# Altium PCB WIFI_PCB.PcbDoc
Units mil, origin at the board's own origin, x right, y up, seen from the top; angles counter-clockwise.
Board outline 1180 x 2621.21 mil, 4 copper layers (Top Layer, GND, 3v3, Bottom Layer), stack 23.756 mil thick; 58 components, 53 nets, 284 pads, 88 vias.
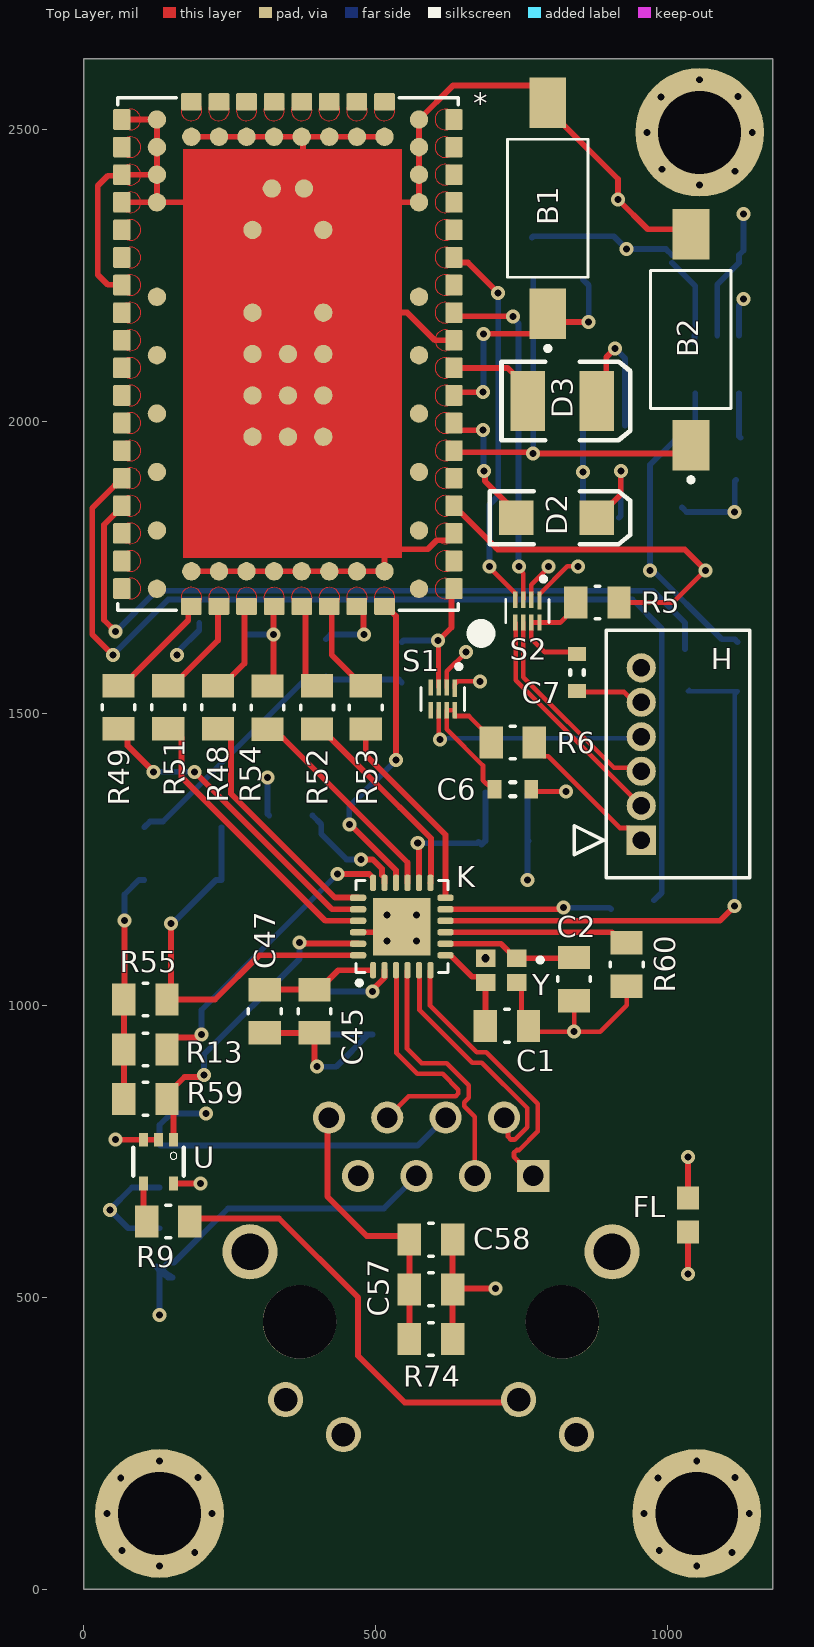
[diagram p0: Top Layer view]
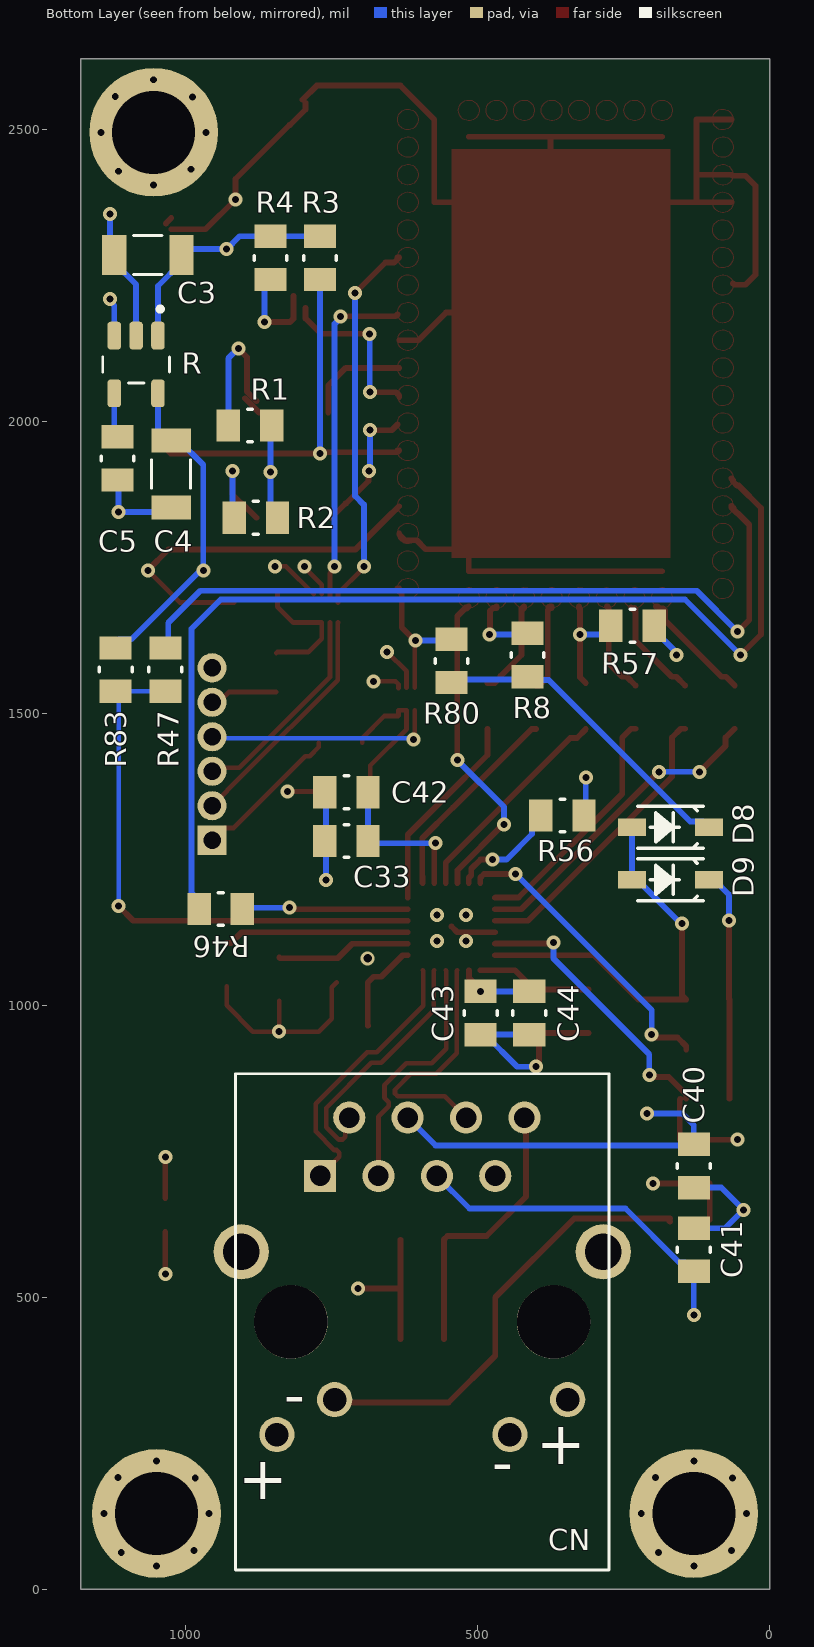
[diagram p1: Bottom Layer view, seen from below]
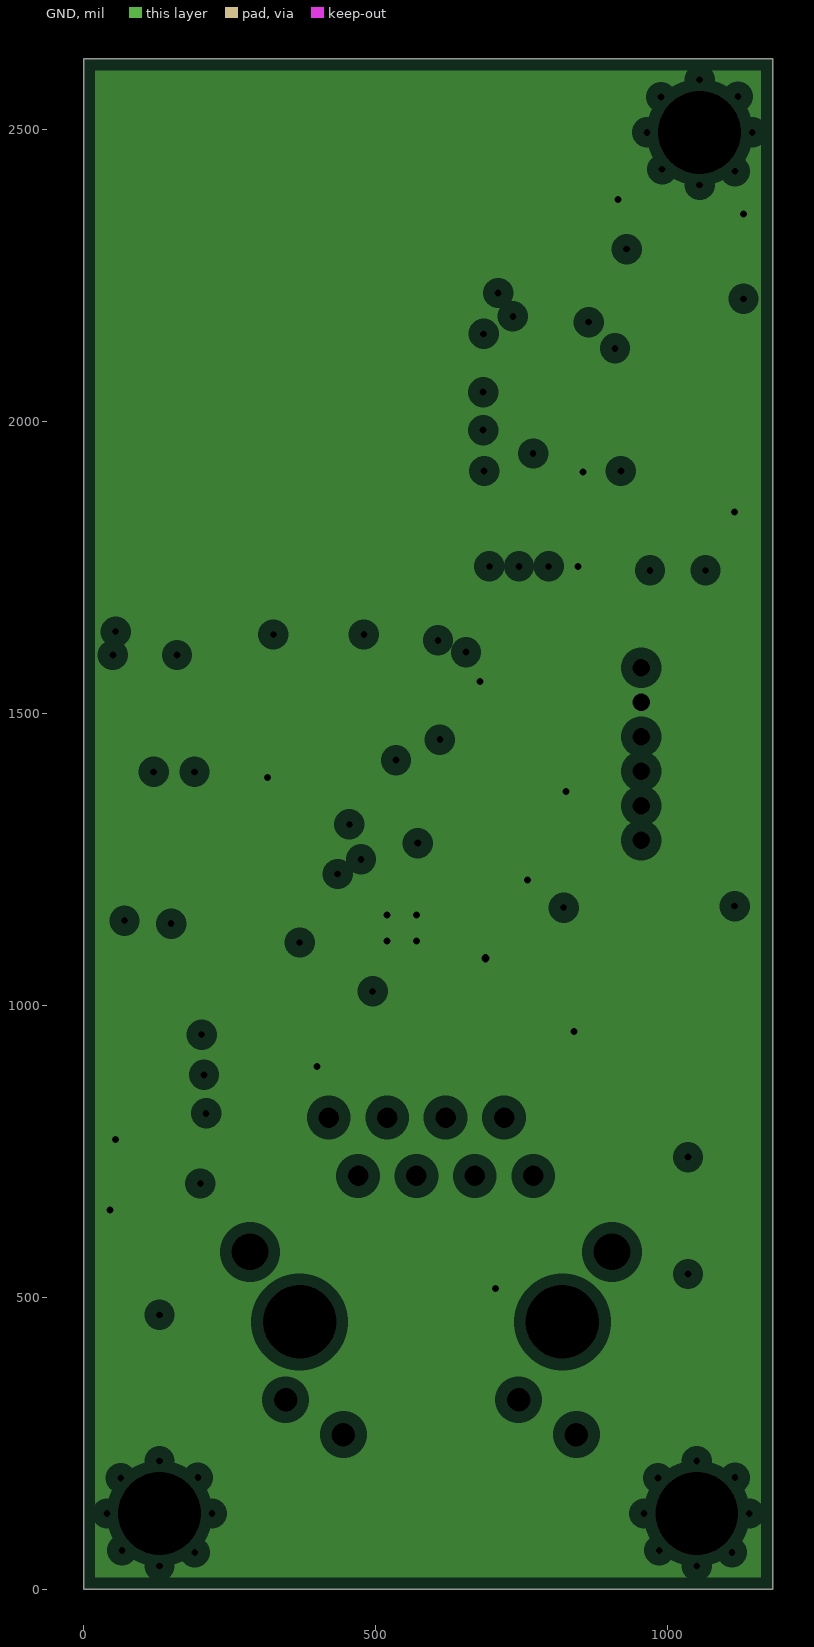
[diagram p2: GND, clearances drawn from the general rule]
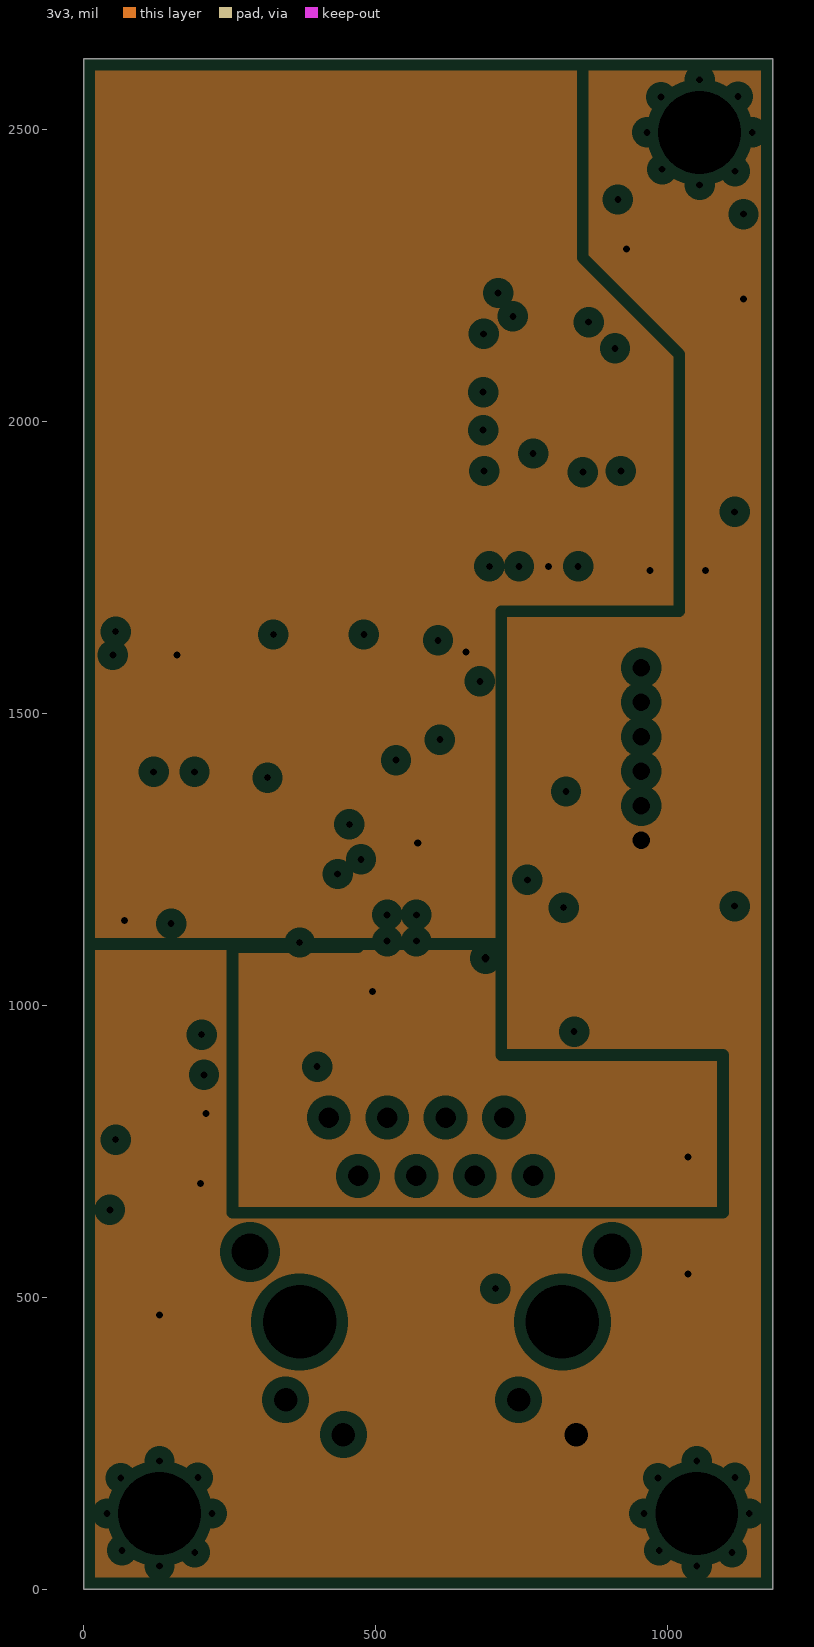
[diagram p3: 3v3, clearances drawn from the general rule]

## Layer stack, top to bottom
Top Solder: solder mask 0.4, Solder Resist, Dk 3.5
Top Layer: signal copper 1.4
Dielectric 2: prepreg 2.8, PP-006, Dk 4.1
GND: plane copper 1.378, net GND
Dielectric 1: dielectric 12.6, FR-4, Dk 4.8
3v3: plane copper 1.378, net (Multiple Nets)
Dielectric 3: prepreg 2.8, PP-006, Dk 4.1
Bottom Layer: signal copper 1.4
Bottom Solder: solder mask 0.4, Solder Resist, Dk 3.5

## Board outline
0,2621.21 0,0 1180,0 1180,2621.21

## Design rules (kind name [scope] priority, off if disabled: settings)
Clearance [All] p1: gap=5 ignorepadtopadclearanceinfootprint=FALSE // Default=10mil
DiffPairsRouting [All] p1: maxlimit=10 minlimit=10 mostfreqgap=10 toplayer_minwidth=8 toplayer_maxwidth=15 toplayer_prefwidth=15 bottomlayer_minwidth=10 bottomlayer_maxwidth=15 bottomlayer_prefwidth=15 maxuncoupledlength=500 // DefaultMinWidth=15mil
HoleSize [All] p1: absolutevalues=TRUE maxlimit=150 minlimit=1 maxpercent=80.000 minpercent=20.000 // MaximumDefault=100mil
MinimumSolderMaskSliver [All] p1: minsoldermaskwidth=1 // Default=10mil
PlaneClearance [All] p1: clearance=20
PlaneConnect [All] p1: planeconnectstyle=Relief reliefexpansion=20 reliefentries=4 reliefconductorwidth=10 reliefairgap=10
PolygonConnect [All] p1: connectstyle=Relief reliefconductorwidth=10 reliefentries=4 polygonreliefangle="90 Angle" airgapwidth=10
RoutingVias [All] p1: holewidth=28 width=50 viastyle="Through Hole" minholewidth=28 minwidth=50 maxholewidth=28 maxwidth=50
SilkToSolderMaskClearance [IsPad] p1: minsilkscreentomaskgap=4 clearancetoexposedcopper=TRUE // Default=10mil
SolderMaskExpansion [All] p1: expansion=4 istentingtop=FALSE
Width [All] p1: maxlimit=10 minlimit=8 preferedwidth=10 minimp=50.000000 maximp=50.000000 favimp=50.000000 // MinWidthDefault=10mil
24 further rules are at their usual default settings.

## Classes and differential pairs
differential pair PHY_TX: +PHY_TX_P -PHY_TX_N
differential pair PHY_RX: +PHY_RX_P -PHY_RX_N

## Components (designator, comment, footprint, x,y, rotation, side; value= is the part's Value field where it differs from the comment)
* "ODIN-W262" ODIN-W262 349.95,2115.35 r90 top
B1 "push button" TECO-FSMSM 795,2365 r90 top
B2 "push button" TECO-FSMSM 1040,2140 r90 top
C1 "22uF 10V" 0805 725,965 r0 top value=22uF
C2 "22uF 10V" 0805 840,1045 r270 top value=22uF
C3 "10UF 25V" 1206 1065,2285 r0 bottom value=10uF
C4 "10UF 25V" 1206 1025,1910 r270 bottom value=10uF
C5 "10nF 50V" 0805 1117,1936.69 r270 bottom value=10nF
C6 "100pF" 0603 735,1370 r0 top
C7 "100pF" 0603 845,1570 r270 top
C33 "2.2uF 16V" 0805 725,1281.72 r180 bottom value=2.2uF
C40 "100nF 50V" 0805 130,725 r90 bottom value=100nF
C41 "100nF 50V" 0805 130,581.49 r270 bottom value=100nF
C42 "100nF 50V" 0805 725,1365 r180 bottom value=100nF
C43 "2.2uF 16V" 0805 495,987 r90 bottom value=2.2uF
C44 "100nF 50V" 0805 411.72,987 r90 bottom value=100nF
C45 "100nF 50V" 0805 395.32,990 r90 top value=100nF
C47 "100nF 50V" 0805 310.32,990 r90 top value=100nF
C57 "100nF 50V" 0805 595,513.79 r0 top value=100nF
C58 "100nF 50V" 0805 595,598.79 r0 top value=100nF
CN "CN J00-0045NL" "RJ45 J00-0045NL" 595,457.91 r0 bottom
D2 "LED2" 3.2X1.6X1.1 810,1835 r0 top
D3 "LED3" 3.5X2.8X1.9 820,2035 r0 top
D8 "SM5817PL-TP" SOD-123 170,1305 r0 bottom
D9 "SM5817PL-TP" SOD-123 170,1215 r0 bottom
FL "BLM18PG300SN1D" BEADC1608X95N 1035,641.06 r90 top
H "S6B-ZR(LF)(SN)" S6B-ZR_JST 955,1282.83 r90 top
K "KSZ8081RNAIA-TR" QFN50P400X400X90-25N 545,1135 r90 top
R "LP2992IM5-1.8" SOT95P280X145-5N 1085,2097.5 r270 bottom
R1 "270" 0805 890,1993 r0 bottom
R2 "270" 0805 880,1835 r0 bottom
R3 "1k" 0805 770,2280 r90 bottom
R4 "1k" 0805 855,2280 r90 bottom
R5 "200k" 0805 880,1690 r0 top
R6 "200k" 0805 735,1450 r0 top
R8 "JUMPER" 0805 415,1600 r90 bottom value=0
R9 "120" 0805 145,630 r180 top
R13 "1k" 0805 106,924.46 r180 top
R46 "10.0" 0805 940,1165 r0 bottom
R47 "10.0" 0805 1035,1575 r90 bottom
R48 "10.0" 0805 230,1510.63 r270 top
R49 "10.0" 0805 60,1510.63 r270 top
R51 "10.0" 0805 145,1510.63 r270 top
R52 "10.0" 0805 400,1510.24 r90 top
R53 "10.0" 0805 483.28,1510.24 r90 top
R54 "10.0" 0805 315,1510 r90 top
R55 "1k" 0805 106,1010 r180 top
R56 "1k" 0805 355,1325 r180 bottom
R57 "1k" 0805 235,1650 r0 bottom
R59 "1k" 0805 106,840 r0 top
R60 "6.8k" 0805 930,1070 r90 top
R74 "16m" 0805 595,428.79 r180 top
R80 "JUMPER" 0805 545,1590 r90 bottom value=0
R83 "4.7k" 0805 1120,1575 r270 bottom
S1 "PCA9306DQER" SON35P140X100X40-8N 615,1525 r270 top
S2 "PCA9306DQER" SON35P140X100X40-8N 760,1675 r270 top
U "NC7SZ125" SC70-5 128.41,732.4 r180 top
Y "ECS-250-10-37-JTN-TR" XTAL_ECS-250-10-37-JTN-TR 715,1060 r180 top

## Footprints (in the part's own frame and the unit in brackets; to place one, negate y for a bottom-side part, rotate by r counter-clockwise, add the part's x,y. Pads: shape width x height; smd on the part's side, far side on the other; paste and mask are expansions set on the pad)
3.2X1.6X1.1 [mm]
  rect 1.5x1.5 smd: 1(-1.75,0) 2(1.75,0)
  silkscreen extent -2.9,-1.15 3.2,1.15
3.5X2.8X1.9 [mm] "SM LED; 2 C-Bend Leads; Body 3.5 x 2.8 x 1.9 mm, inc leads (LxWxH typ)"
  rect 1.5x2.6 smd: 1(-1.5,0) 2(1.5,0)
  silkscreen extent -2.65,-1.7 2.95,1.7
0603 [mm] "Chip Resistor, 2-Leads, Body 1.60x0.80mm, IPC High Density"
  rect 0.6x0.8 smd: 1(-0.8,0) 2(0.8,0)
  silkscreen extent -0.1,-0.3 0.1,0.3, body extent -0.8,-0.4 0.8,0.4, height 0.6
0805 [mil]
  rect 40x55 smd: 1(-37,0) 2(37,0)
  silkscreen extent -4,-28 4,28, body extent -47,-28 47,28, height 24
1206 [mm]
  rect 1.05x1.72 smd: 1(-1.46,0) 2(1.46,0)
  silkscreen extent -0.62,-0.85 0.62,0.85
BEADC1608X95N [mm]
  rect 1x0.97 smd: 1(-0.735,0) 2(0.735,0)
ODIN-W262 [mm]
  round 0.8 smd: 1(6.6,-5.7) 2(7.8,-5.7) 3(9,-5.7) 4(10.2,-5.7) 5(9.45,-4.2) 6(9.45,-3) 7(9.45,-1.8) 8(9.45,-0.6) 9(9.45,0.6) 10(9.45,1.8) 11(9.45,3) 12(9.45,4.2) 13(10.2,5.7) 14(9,5.7) 15(7.8,5.7) 16(6.6,5.7) 17(-9.45,4.2) 18(-9.45,3) 19(-9.45,1.8) 20(-9.45,0.6) 21(-9.45,-0.6) 22(-9.45,-1.8) 23(-9.45,-3) 24(-9.45,-4.2) 25(-3.6,-1.54) 26(-1.8,-1.54) 27(0,-1.54) 28(1.8,-1.54) 29(5.4,-1.54) 30(7.2,-0.7) 31(-3.6,0) 32(-1.8,0) 33(0,0) 34(-3.6,1.54) 35(-1.8,1.54) 36(0,1.54) 37(1.8,1.54) 38(5.4,1.54) 39(7.2,0.7) TP1(2.49,-5.7) TP2(2.49,5.7) TP3(-0.05,-5.7) TP4(-0.05,5.7) TP5(-2.59,-5.7) TP6(-2.59,5.7) TP7(-5.13,-5.7) TP8(-5.13,5.7) TP9(-7.67,-5.7) TP10(-7.67,5.7) TP11(-10.21,-5.7) TP12(-10.21,5.7)
  rrect15% 0.9x0.75 smd paste-1 mask+0: A1(-10.2,-7.225) A2(-9,-7.225) A3(-7.8,-7.225) A4(-6.6,-7.225) A5(-5.4,-7.225) A6(-4.2,-7.225) A7(-3,-7.225) A8(-1.8,-7.225) A9(-0.6,-7.225) A10(0.6,-7.225) A11(1.8,-7.225) A12(3,-7.225) A13(4.2,-7.225) A14(5.4,-7.225) A15(6.6,-7.225) A16(7.8,-7.225) A17(9,-7.225) A18(10.2,-7.225) C1(10.2,7.225) C2(9,7.225) C3(7.8,7.225) C4(6.6,7.225) C5(5.4,7.225) C6(4.2,7.225) C7(3,7.225) C8(1.8,7.225) C9(0.6,7.225) C10(-0.6,7.225) C11(-1.8,7.225) C12(-3,7.225) C13(-4.2,7.225) C14(-5.4,7.225) C15(-6.6,7.225) C16(-7.8,7.225) C17(-9,7.225) C18(-10.2,7.225)
  rrect15% 0.75x0.9 smd paste-1 mask+0: B1(10.975,-4.2) B2(10.975,-3) B3(10.975,-1.8) B4(10.975,-0.6) B5(10.975,0.6) B6(10.975,1.8) B7(10.975,3) B8(10.975,4.2) D1(-10.975,4.2) D2(-10.975,3) D3(-10.975,1.8) D4(-10.975,0.6) D5(-10.975,-0.6) D6(-10.975,-1.8) D7(-10.975,-3) D8(-10.975,-4.2)
  Top Layer circle w0: c10.2,6.85 r0.45
  Top Layer circle w0: c10.6,4.2 r0.45
  Top Layer circle w0: c10.6,3 r0.45
  Top Layer circle w0: c10.6,1.8 r0.45
  Top Layer circle w0: c10.6,0.6 r0.45
  Top Layer circle w0: c10.6,-0.6 r0.45
  Top Layer circle w0: c10.6,-1.8 r0.45
  Top Layer circle w0: c10.6,-3 r0.45
  Top Layer circle w0: c10.6,-4.2 r0.45
  Top Layer circle w0: c4.2,6.85 r0.45
  Top Layer circle w0: c5.4,6.85 r0.45
  Top Layer circle w0: c9,6.85 r0.45
  Top Layer circle w0: c-10.2,6.85 r0.45
  Top Layer circle w0: c-9,6.85 r0.45
  Top Layer circle w0: c-7.8,6.85 r0.45
  Top Layer circle w0: c-4.2,6.85 r0.45
  Top Layer circle w0: c-3,6.85 r0.45
  Top Layer circle w0: c-1.8,6.85 r0.45
  Top Layer circle w0: c-0.6,6.85 r0.45
  Top Layer circle w0: c0.6,6.85 r0.45
  Top Layer circle w0: c1.8,6.85 r0.45
  Top Layer circle w0: c-5.4,-6.85 r0.45
  Top Layer circle w0: c-9,-6.85 r0.45
  Top Layer circle w0: c10.2,-6.85 r0.45
  Top Layer circle w0: c9,-6.85 r0.45
  Top Layer circle w0: c7.8,-6.85 r0.45
  Top Layer circle w0: c6.6,-6.85 r0.45
  Top Layer circle w0: c5.4,-6.85 r0.45
  Top Layer circle w0: c3,-6.85 r0.45
  Top Layer lines w0: -4.2,-7.3 ccw(c-4.2,-6.85) -4.169,-7.299 ccw(c-4.2,-6.85) -4.27,-7.295 ccw(c-4.2,-6.85) -4.2,-7.3 ; -4.2,-7.3 ccw(c-4.2,-6.85) -4.2,-7.3 ; -5.414,7.3 cw(c-5.4,6.85) -5.4,6.4 cw(c-5.4,6.85) -5.667,6.488 cw(c-5.4,6.85) -5.486,7.292 cw(c-5.4,6.85) -5.414,7.3 ; 2.968,7.299 cw(c3,6.85) 3.07,7.295 cw(c3,6.85) 3.131,7.281 cw(c3,6.85) 3,6.4 cw(c3,6.85) 2.968,7.299 ; 7.756,7.298 cw(c7.8,6.85) 7.8,6.4 cw(c7.8,6.85) 7.669,7.281 cw(c7.8,6.85) 7.756,7.298 ; 6.53,7.295 cw(c6.6,6.85) 6.6,6.4 cw(c6.6,6.85) 6.53,7.295 ; -6.731,7.281 ccw(c-6.6,6.85) -6.6,6.4 ccw(c-6.6,6.85) -6.731,7.281 ; -11.031,4.331 ccw(c-10.6,4.2) -11.042,4.286 ccw(c-10.6,4.2) -11.045,4.27 ccw(c-10.6,4.2) -11.047,4.251 ccw(c-10.6,4.2) -11.05,4.207 ccw(c-10.6,4.2) -11.05,4.2 ccw(c-10.6,4.2) -11.045,4.13 ccw(c-10.6,4.2) -10.6,3.75 ccw(c-10.6,4.2) -11.031,4.331 ; -11.031,3.131 cw(c-10.6,3) -10.6,2.55 cw(c-10.6,3) -11.05,3 cw(c-10.6,3) -11.045,3.07 cw(c-10.6,3) -11.037,3.107 cw(c-10.6,3) -11.031,3.131 ; -11.042,1.886 ccw(c-10.6,1.8) -11.05,1.8 ccw(c-10.6,1.8) -11.045,1.73 ccw(c-10.6,1.8) -10.6,1.35 ccw(c-10.6,1.8) -11.042,1.886 ; -11.047,0.651 ccw(c-10.6,0.6) -11.05,0.6 ccw(c-10.6,0.6) -11.031,0.469 ccw(c-10.6,0.6) -10.6,0.15 ccw(c-10.6,0.6) -11.047,0.651 ; -11.05,-0.6 ccw(c-10.6,-0.6) -11.05,-0.619 ccw(c-10.6,-0.6) -11.049,-0.636 ccw(c-10.6,-0.6) -11.031,-0.731 ccw(c-10.6,-0.6) -10.6,-1.05 ccw(c-10.6,-0.6) -11.05,-0.6 ; -11.048,-1.762 ccw(c-10.6,-1.8) -11.05,-1.8 ccw(c-10.6,-1.8) -11.045,-1.87 ccw(c-10.6,-1.8) -11.039,-1.901 ccw(c-10.6,-1.8) -11.031,-1.931 ccw(c-10.6,-1.8) -10.6,-2.25 ccw(c-10.6,-1.8) -11.048,-1.762 ; -11.031,-2.869 ccw(c-10.6,-3) -11.05,-3 ccw(c-10.6,-3) -11.049,-3.032 ccw(c-10.6,-3) -11.043,-3.076 ccw(c-10.6,-3) -11.042,-3.086 ccw(c-10.6,-3) -11.034,-3.118 ccw(c-10.6,-3) -11.031,-3.131 ccw(c-10.6,-3) -10.6,-3.45 ccw(c-10.6,-3) -11.031,-2.869 ; -11.05,-4.2 ccw(c-10.6,-4.2) -11.031,-4.331 ccw(c-10.6,-4.2) -10.975,-4.449 ccw(c-10.6,-4.2) -10.6,-4.65 ccw(c-10.6,-4.2) -11.05,-4.2 ; 0.6,-6.4 cw(c0.6,-6.85) 0.6,-7.3 cw(c0.6,-6.85) 0.6,-6.4 ; -8.067,-6.488 ccw(c-7.8,-6.85) -8.098,-6.513 ccw(c-7.8,-6.85) -7.8,-7.3 ccw(c-7.8,-6.85) -8.067,-6.488 ; -10.069,-7.281 cw(c-10.2,-6.85) -10.114,-7.292 cw(c-10.2,-6.85) -10.2,-7.3 cw(c-10.2,-6.85) -10.27,-7.295 cw(c-10.2,-6.85) -10.069,-7.281 ; -6.731,-7.281 cw(c-6.6,-6.85) -6.6,-7.3 cw(c-6.6,-6.85) -6.613,-7.3 cw(c-6.6,-6.85) -6.667,-7.295 cw(c-6.6,-6.85) -6.67,-7.295 cw(c-6.6,-6.85) -6.697,-7.289 cw(c-6.6,-6.85) -6.731,-7.281 ; -3.131,-7.281 cw(c-3,-6.85) -3,-7.3 cw(c-3,-6.85) -3.057,-7.296 cw(c-3,-6.85) -3.131,-7.281 ; -0.514,-7.292 cw(c-0.6,-6.85) -0.6,-7.3 cw(c-0.6,-6.85) -0.614,-7.3 cw(c-0.6,-6.85) -0.67,-7.295 cw(c-0.6,-6.85) -0.514,-7.292 ; -1.87,-7.295 cw(c-1.8,-6.85) -1.73,-7.295 cw(c-1.8,-6.85) -1.787,-7.3 cw(c-1.8,-6.85) -1.8,-7.3 cw(c-1.8,-6.85) -1.87,-7.295 ; 1.73,-7.295 ccw(c1.8,-6.85) 1.8,-7.3 ccw(c1.8,-6.85) 1.849,-7.297 ccw(c1.8,-6.85) 1.87,-7.295 ccw(c1.8,-6.85) 1.73,-7.295 ; 4.13,-7.295 ccw(c4.2,-6.85) 4.2,-7.3 ccw(c4.2,-6.85) 4.13,-7.295
  silkscreen extent -12.4,-8.65 11.15,7.4, body extent -11.15,-7.4 11.15,7.4, height 4.8
QFN50P400X400X90-25N [mm]
  rrect70% 0.71x0.27 smd: 1(-1.9,1.25) 2(-1.9,0.75) 3(-1.9,0.25) 4(-1.9,-0.25) 5(-1.9,-0.75) 6(-1.9,-1.25) 13(1.9,-1.25) 14(1.9,-0.75) 15(1.9,-0.25) 16(1.9,0.25) 17(1.9,0.75) 18(1.9,1.25)
  rrect70% 0.27x0.71 smd: 7(-1.25,-1.9) 8(-0.75,-1.9) 9(-0.25,-1.9) 10(0.25,-1.9) 11(0.75,-1.9) 12(1.25,-1.9) 19(1.25,1.9) 20(0.75,1.9) 21(0.25,1.9) 22(-0.25,1.9) 23(-0.75,1.9) 24(-1.25,1.9)
  rect 2.5x2.5 smd paste-2: 25(0,0)
  silkscreen extent -2.55,-2 2,2
"RJ45 J00-0045NL" [mm]
  rect 1.398x1.398 hole 0.89: 1(4.445,-6.35)
  round 1.398 hole 0.89: 2(3.175,-8.89) 3(1.905,-6.35) 4(0.635,-8.89) 5(-0.635,-6.35) 6(-1.905,-8.89) 7(-3.175,-6.35) 8(-4.445,-8.89)
  round 1.53 hole 1.02: 9(6.325,4.9) 10(3.81,3.38) 11(-3.81,4.9) 12(-6.325,3.38)
  round 3.2 hole 3.2 unplated: None(-5.715,0) None(5.715,0)
  round 2.4 hole 1.6: S1(-7.875,-3.05) S2(7.875,-3.05)
  silkscreen extent -8.13,-10.79 8.13,10.79, body extent -8.12,-10.79 8.12,10.8, height 13.64
S6B-ZR_JST [mil]
  rect 50x50 hole 30 mask+0: 1(0,0)
  round 50 hole 30 mask+0: 2(59.06,0) 3(118.11,0) 4(177.17,0) 5(236.22,0) 6(295.28,0)
  silkscreen extent -64,-186 359,115, body extent 0,0 10,10, height 10
SC70-5 [mm]
  rect 0.4x0.6 smd: 1(-0.65,-0.95) 2(0,-0.95) 3(0.65,-0.95) 4(0.65,0.95) 5(-0.65,0.95)
  silkscreen extent -1.1,-0.6 1.1,0.6
SOD-123 [mil]
  rect 48x30 smd: A(66,0) C(-66,0)
  silkscreen extent -56,-36 56,36
SON35P140X100X40-8N [mm]
  rect 0.77x0.19 smd: 1(-0.465,0.525)
  rect 0.71x0.19 smd: 2(-0.495,0.175) 3(-0.495,-0.175) 4(-0.495,-0.525) 5(0.495,-0.525) 6(0.495,-0.175) 7(0.495,0.175) 8(0.495,0.525)
  silkscreen extent -1.5,-0.94 0.5,0.94
SOT95P280X145-5N [mm]
  rrect50% 1.21x0.59 smd: 1(-1.255,0.95) 2(-1.255,0) 3(-1.255,-0.95) 4(1.255,-0.95) 5(1.255,0.95)
  silkscreen extent -2.51,-1.45 0.8,1.45
TECO-FSMSM [mm]
  rect 2.19x1.6 smd: 1(-4.59,0) 2(4.59,0)
  silkscreen extent -6.2,-1.75 3,1.75
XTAL_ECS-250-10-37-JTN-TR [mm]
  rect 0.85x0.75 smd: 1(-0.675,-0.525) 2(0.675,-0.525) 3(0.675,0.525) 4(-0.675,0.525)
  silkscreen extent -1.8,-0.55 -1.6,-0.35

## Part data
B1 B2: library part Teco-FSMSM
C1 C2: library part "CAP 22uF 10V", "CAP CER 2.2UF 10V X5R 0805", Operating Temperature="-55°C ~ 85°C", Package=0805, Rating=10V, Temperature Coefficient=X5R, Tolerance=20%
C3 C4: library part "CAP 10uF 25V", "CAP CER 10UF 25V X5R 1206", Operating Temperature="-55°C ~ 85°C", Package=1206, Rating=25V, Temperature Coefficient=X5R, Tolerance=10%
C5: library part "CAP 10nF 50V", "CAP CER 10000PF 50V X7R 0805", Operating Temperature="-55°C ~ 125°C", Package=0805, Rating=50V, Temperature Coefficient=X7R, Tolerance=10%
C6 C7: library part "CAP 100pF 16V", "CAP CER 100PF 16V X5R 0603/0805", Operating Temperature="-55°C ~ 85°C", Package=0603/0805, Rating=16V, Temperature Coefficient=X5R, Tolerance=10%
C33 C43: library part "CAP 2.2uF 16V", "CAP CER 2.2UF 16V X7R 0805", Operating Temperature="-55°C ~ 125°C", Package=0805, Rating=16V, Temperature Coefficient=X7R, Tolerance=10%
C40 C41 C42 C44 C45 C47 C57 C58: library part "CAP 100nF 50V", "CAP CER 0.1UF 50V X7R 0805", Package=0805, Rating=50V, Tolerance=10%
CN: library part "CN MAGJACK", "CN MAGJACK 1PORT 100 BASE-TX", Package=None, Supplier Part Number 1=673-J00-0045NL, Digikey=553-1619-5-ND, Digikey Link=https://www.digikey.com/product-detail/en/pulse-electronics-network/J00-0045NL/553-1619-5-ND/1036860?utm_source=snapeda&utm_medium=aggregator&utm_campaign=symbol, MF="Pulse Electronics", MP=J00-0045NL, SnapEDA_Link=https://www.snapeda.com/parts/J00-0045NL/Pulse%20Electronics%20Network/view-part/87956/?ref=snap, Supplier 1=Mouser
D2: library part "LED RED SMD", "Typical RED, GREEN, YELLOW, AMBER GaAs LED", Color=Red, Current - Test=20mA, Lens Color=Colorless, Package=1206, Voltage - Forward (Vf) (Typ)=1.7V, Lens Transparency=Clear
D3: "Typical BLUE SiC LED", DatasheetVersion=16-Apr-2002, LatestRevisionDate=17-Dec-2003, LatestRevisionNote="PCB Footprint replaced.", PackageDescription="SM LED; 2 C-Bend Leads; Body 3.5 x 2.8 x 1.9 mm, inc leads (LxWxH typ)", PackageReference=3.5X2.8X1.9, PackageVersion=16-Apr-2002, Published=8-Jun-2000, Publisher="Altium Limited"
D8 D9: library part "DIODE SCHOTTKY 20V 1A", "Diode Schottky 20V 1A Surface Mount SOD-123FL", Current Rating=1A, Package=SOD-123, Voltage Rating=20V, ComponentLink1Description=digikey, ComponentLink1URL=https://www.digikey.ca/product-detail/en/on-semiconductor/MBR0540T1G/MBR0540T1GOSCT-ND/917967, Digikey=SM5817PL-TPMSCT-ND, Digikey Link=https://www.digikey.ca/product-detail/en/micro-commercial-co/SM5817PL-TP/SM5817PL-TPMSCT-ND/1793410, MF="Micro Commercial Co", MP=SM5817PL-TP
FL: "30 Ohms @ 100MHz 1 Power Line Ferrite Bead 0603 _1608 Metric_ 1A 50mOhm", Package="1608 Murata", Availability=Unavailable, MF=Murata, MP=BLM18PG300SN1D, Price=None, SnapEDA_Link=https://www.snapeda.com/parts/BLM18PG300SN1D/Murata/view-part/270173/?ref=snap
H: "No Description Available", Built_By=EMA_UL_Team, Copyright="Copyright (C) 2018 Accelerated Designs. All rights reserved", Manufacturer_Part_Number=S6B-ZR(LF)(SN), RefDes=RefDes, SourceLibrary=JST_2017-04-18, Type=DEV, Vendor=JST
K: "1/1 Transceiver Full RMII 24-QFN _4x4_", Package="QFN-24 Microchip", Availability=Unavailable, MF=Microchip, MP=KSZ8081RNAIA-TR, Price=None, SnapEDA_Link=https://www.snapeda.com/parts/KSZ8081RNAIA-TR/Microchip/view-part/482545/?ref=snap
R: Package=None, Availability=Unavailable, MP=LP2992IM5-1.8/NOPB, Price=None
R1 R2: library part "RES 270 1/8W", "RES SMD 270 OHM 5% 1/8W 0805", Package=0805, Power (Watts)=0.125W, Tolerance=5%
R3 R4 R13 R55 R56 R57 R59: library part "RES 1k 1/8W", "RES SMD 1K OHM 5% 1/8W 0805", Package=0805, Power (Watts)=0.125W, Tolerance=5%
R5 R6: library part "RES 200k 1/8W", "RES SMD 200K OHM 5% 1/8W 0805", Package=0805, Power (Watts)=0.125W, Tolerance=5%
R8 R80: library part "RES 0 JUMPER", "RES SMD 0 OHM JUMPER GENERIC 0805", Package=0805
R9: library part "RES 120.0 1/8W", "RES SMD 120 OHM 5% 1/8W 0805", Package=0805, Power (Watts)=0.125W, Tolerance=5%
R46 R47 R48 R49 R51 R52 R53 R54: library part "RES 10.0 1/8W - 5%", "RES SMD 10.0 OHM 5% 1/8W 0805", Package=0805, Power (Watts)=0.125W, Tolerance=5%
R60: library part "RES 6.8k 1/8W", "RES SMD 6.8K OHM 5% 1/8W 0805", Package=0805, Power (Watts)=0.125W, Tolerance=5%
R74: library part "RES 16m 1/2W", "RES SMD 0.016 OHM 1% 1/2W 0805 Thick Film", Case Code (Imperial)=0805, Case Code (Metric)=2012, Manufacturer=Panasonic, Manufacturer Part Number=ERJ-6BWFR016V, Max Operating Temperature=155°C, Max Power Dissipation=500mW, Min Operating Temperature=-55°C, Package Quantity=1, Resistance=16mR, Supplier Part Number 1=P.016AQCT-ND, Temperature Coefficient=200ppm/°C, Tolerance=1%, Case/Package=0805, Category="Chip SMD Resistors", ComponentLink1Description=https://datasheet.ciiva.com/11808/0900766b8126441d-11808690.pdf?src-supplier=RSComponents, ComponentLink1URL=https://datasheet.ciiva.com/11808/0900766b8126441d-11808690.pdf?src-supplier=RSComponents, ComponentLink2Description=https://datasheet.ciiva.com/2452/aoa0000ce3-2452594.pdf?src-supplier=Digi-Key, ComponentLink2URL=https://datasheet.ciiva.com/2452/aoa0000ce3-2452594.pdf?src-supplier=Digi-Key, ComponentLink3Description=https://datasheet.ciiva.com/2452/aoa0000ce3-2452592.pdf?src-supplier=Digi-Key, ComponentLink3URL=https://datasheet.ciiva.com/2452/aoa0000ce3-2452592.pdf?src-supplier=Digi-Key, ComponentLink4Description=https://datasheet.ciiva.com/2452/aoa0000ce3-2452593.pdf?src-supplier=Digi-Key, ComponentLink4URL=https://datasheet.ciiva.com/2452/aoa0000ce3-2452593.pdf?src-supplier=Digi-Key, ComponentLink5Description=https://datasheet.ciiva.com/9192/aoa0000ce3-9192761.pdf?src-supplier=Avnet, ComponentLink5URL=https://datasheet.ciiva.com/9192/aoa0000ce3-9192761.pdf?src-supplier=Avnet, ComponentLink6Description=https://datasheet.ciiva.com/17211/aoa0000ce3-17211370.pdf?src-supplier=Avnet+Europe, ComponentLink6URL=https://datasheet.ciiva.com/17211/aoa0000ce3-17211370.pdf?src-supplier=Avnet+Europe, Composition="Thick Film", Contact Plating=Tin, Depth=1.25mm, Features="Automotive AEC-Q200", Height=0.028inch, Lead Free="Lead Free", Length=2mm, Military Standard=Not, Mount="Surface Mount", Number of Pins=2, Number of Terminations=2, Packaging="Tape and Reel", Power Rating=500mW, Pricing 1="1=0.65000, 10=0.53800, 100=0.36140, 1000=0.21148, 2500=0.20917 (USD)", Radiation Hardening=No, RoHS=Yes, Stock 1=4585, Supplier 1=Digi-Key, Termination=SMD/SMT, Width=0.049inch
R83: library part "RES 4.7k 1/8W - 5%", "RES SMD 4.7k OHM 5% 1/8W 0805", Package=0805, Power (Watts)=0.125W, Tolerance=5%
S1 S2: "2-bit bidirectional I2C bus and SMBus voltage-level shifter 8-X2SON -40 to 85", Package="X2SON-8 Texas Instruments", Availability=Warning, MF="Texas Instruments", Mouser-Purchase-URL=https://snapeda.com/shop?store=Mouser&id=39064, MP=PCA9306DQER, Price=None, SnapEDA_Link=https://www.snapeda.com/parts/PCA9306DQER/Texas%20Instruments/view-part/39064/?ref=snap, Texas_Instruments-Purchase-URL=https://snapeda.com/shop?store=Texas+Instruments&id=39064
U: "Buffer, Non-Inverting 1 Element 1 Bit per Element 3-State Output SC-70-5", Package="SC-70 ON Semiconductor", Availability=Unavailable, MF="ON Semiconductor", MP=NC7SZ125, Price=None, SnapEDA_Link=https://www.snapeda.com/parts/NC7SZ125/ON%20Semiconductor/view-part/2686816/?ref=snap
Y: "SMD Crystal 2.0 x 1.6 x 0.45 mm ceramic package", Package=None, Availability=Unavailable, MP=ECS-250-10-37-JTN-TR, Price=None

## Free pads (board coordinates)
  round 125.98 hole 142 unplated: 6(130,130) 6(1050,130) 6(1055,2495)
  round 220.47 hole 141.73: ""(130,130) ""(1050,130) ""(1055,2495)

## Via types
v1: diameter 24, hole 12, Top Layer to Bottom Layer, 63 vias
v2: diameter 23.62, hole 11.81, Top Layer to Bottom Layer, tented both sides, 24 vias
v3: diameter 24, hole 14, Top Layer to Bottom Layer, 1 vias

## Nets (pads, with @x,y where several pads share a name; then routed paths per layer and width w, separated by ;. In a path a pad name is that pad's centre, name@x,y a point inside that pad or via, vN(x,y) a via of type N, cw(c..) or ccw(c..) an arc to the next point about the centre after c; other vN are vias at no path point)
1v8: C4.1 C33.2 C42.2 D9.C K.14 R13.2 R55.2 R57.1 R59.1 R83.1 R.5 S1.2 S2.2 | length 1416.6
  Top Layer w8: S1.2 621.89,1571.89 v1(655,1605) ; S2.2@766.89,1704.46 766.89,1720.12 v1@793.37,1746.6
  Top Layer w10: R59.1 R13.2 R55.2 70,1011 v1(70,1145) ; v1(572.26,1277.74) 574.53,1275.47 K.14
  Bottom Layer w10: v1(70,1145) 70,1190 95,1215 D9.C ; v1(160,1600) 162.68,1602.68 162.68,1607.18 198,1642.5 R57.1@198,1655 ; v1(572.26,1277.74) 674.01,1277.74 676.28,1280 681.28,1275 C33.2 C42.2 ; C4.1 1011.81,1967.48 970,1925.67 v1(970,1745) 970,1750 1093,1627 1115,1627 R83.1@1120,1622 ; C4.1@1030,1967.48 1031.93,1967.48 1047.6,1983.15 R.5
  other v1: 796.29,1751.94
3v3: *.A4 C3.1 C40.2 C41.2 CN.4 CN.5 CN.9 FL.1 H.1 R3.2 R4.2 R5.2 R6.2 R.1 R.3 U.5 | length 2769.4
  Top Layer w8: R6.2 772,1442.5 788,1426.5 795.5,1426.5 918.17,1303.83 934,1303.83 H.1 ; R5.2 1010,1690 1063.06,1743.06 1063.06,1745 v1(1065,1745)
  Top Layer w10: U.5 v1(200,695) ; *.A4@634.71,1854.75 640.18,1849.27 645.99,1843.47 646.4,1843.47 706.43,1783.44 709.37,1780.5 1029.5,1780.5 v1(1065,1745) ; v1(1035,540) FL.1
  Bottom Layer w10: v1(130,470) C41.2 ; C41.2@132.39,547.98 124.99,553.03 C41.2 ; C41.2@142.15,536.62 131.15,542.52 C41.2 ; C41.2@144.85,533.92 152.5,533.92 147.36,537.51 144.28,539.67 133.04,547.53 145,559.49 154.49,559.49 247.15,652.15 514.23,652.15 CN.5 ; v1(210,815) 150,815 130,795 C40.2 132,760 572.09,760 CN.4 ; R3.2@768,2315 R3.2 R4.2 908,2317 v1(930,2295) 997.52,2295 C3.1 ; C3.1@1007.52,2271.81 1047.6,2231.73 R.1 ; R.1@1046.11,2136.19 R.1@1046.11,2146.91 ; R.3 1122.4,2198.61 1130,2206.21 v1(1130,2210)
BlueLED: *.A9 D3.1 | length 180.7
  Top Layer w10: *.A9 637.35,2091.72 725.87,2091.72 755.94,2061.65 D3.1@755.94,2015
BYPASS: C5.1 R.4 | length 77.2
  Bottom Layer w10: R.4 1122.4,1974.6 C5.1@1125,1972
CRS_DV: K.15 R54.1 | length 369.3
  Top Layer w10: R54.1 330,1458 341.5,1458 554.84,1244.65 K.15
Diode_2: D2.2 R2.2 | length 178.9
  Top Layer w10: D2.2 903.43,1859.53 904.53,1859.53 920,1875 v1(920,1915)
  Bottom Layer w10: R2.2 920,1838 v1(920,1915)
Diode_3: D3.2 R1.2 | length 276.5
  Top Layer w10: D3.2@874.06,2015 D3.2@898.58,2039.53 ; D3.2 895,2050.95 895,2110 v1(910,2125)
  Bottom Layer w10: v1(910,2125) 927,2108 R1.2
ETH_CRSDV: *.D4 R54.2 R57.2 | length 184
  Top Layer w10: R54.2@315,1552 325,1562 v1(325,1635) 325,1678.98 326.33,1680.31 326.33,1680.42 *.D4
  Bottom Layer w10: R57.2@277,1635 v1(325,1635)
ETH_MDC: K.11 R46.1 | length 285.3
  Top Layer w10: K.11 819.53,1164.53 v1(822.26,1167.26)
  Bottom Layer w10: v1(822.26,1167.26) 900.74,1167.26 R46.1
ETH_MDIO: K.10 R47.1 R83.2 | length 963.5
  Top Layer w10: K.10 1089.84,1144.84 v1(1115,1170)
  Bottom Layer w8: R47.1@1037,1540 R47.1 R83.2 1115,1533 v1(1115,1170)
ETH_REFCLK: *.D8 K.16 | length 549.5
  Top Layer w10: v1(455,1310) 456.21,1310 534.84,1231.37 534.84,1210.12 K.16 ; *.D8 *.D8@518.97,1679.59 ; *.D8@520.45,1681.07 535,1666.52 v1(535,1420)
  Bottom Layer w10: v1(455,1310) 455,1340 v1(535,1420)
ETH_RXD0: *.D5 R52.2 | length 157.3
  Top Layer w10: *.D5@373.57,1680.31 *.D5@374.37,1680.31 ; *.D5@375,1680.37 375,1681.83 *.D5 380,1676.83 380,1562.24 395,1547.24 R52.2 ; *.D5@376.53,1683.26 *.D5@378.72,1681.07
ETH_RXD1: *.D6 R53.2 | length 167.2
  Top Layer w10: *.D6@420.82,1680.31 423.01,1678.12 425,1676.12 425,1600 460.78,1564.22 460.78,1562.24 470.78,1552.24 R53.2@483.28,1552.24 ; *.D6 421.51,1682.56 424.05,1680.03 424.48,1679.59 *.D6@425,1679.08
ETH_TXD0: *.D1 R49.1 | length 201.3
  Top Layer w10: R49.1 75,1562.63 82.63,1562.63 179.35,1659.35 179.35,1676.17 182.58,1679.4 188.46,1679.4 192.32,1683.26 *.D1@195.28,1683.26
ETH_TXD1: *.D2 R51.1 | length 173.3
  Top Layer w10: R51.1 160,1562.63 167.63,1562.63 230,1625 *.D2@230,1673.69 ; *.D2@229.69,1678.15 *.D2@231.84,1680.31 ; *.D2@234.23,1677.92 *.D2@237.41,1681.11
ETH_TXEN: *.D3 R48.1 | length 160.9
  Top Layer w10: R48.1 245,1562.63 252.63,1562.63 275.72,1585.72 275.72,1680.31 275.72,1680.63 278.35,1683.26 *.D3
GND: *.1 *.2 *.3 *.4 *.5 *.6 *.7 *.8 *.9 *.10 *.11 *.12 *.13 *.14 *.15 *.16 *.17 *.18 *.19 *.20 *.21 *.22 *.23 *.24 *.25 *.26 *.27 *.28 *.29 *.30 *.31 *.32 *.33 *.34 *.35 *.36 *.37 *.38 *.39 *.A3 *.A10 *.C1 *.C3 *.C4 *.C7 B1.2 B2.2 C1.2 C2.2 C3.2 C4.2 C5.2 C6.2 C7.2 C33.1 C40.1 C41.1 C42.1 C43.1 C44.1 C45.1 C47.1 C57.2 C58.2 H.5 K.22 K.25 R1.1 R2.1 R56.2 R60.1 R74.1 R.2 S1.1 S2.1 U.2 U.3 Y.2 Y.4 | length 6467.2
  Top Layer w8: S1.1 635.67,1549.74 640.93,1555 v1(678.62,1555) 681.5,1555 v1@685,1551.5 ; Y.4 750,1030.91 750,977 772,955 v1(840,955) ; C6.2@768.46,1370 772.31,1366.15 v1(826.15,1366.15) ; S2.1@780.93,1704.46 828.4,1751.94 v1(846.94,1751.94) ; C2.2 v1(840,955) ; C7.2@845,1536.54 926.15,1536.54 943.63,1519.06 H.5 ; R60.1 930,1000 885,955 v1(840,955)
  Top Layer w10: v1(55,770) 55.1,769.9 102.72,769.9 U.3 U.2 ; *.C7@62.76,2236.2 60.5,2233.94 41.6,2233.94 24.32,2251.21 24.32,2403.43 41.6,2420.7 62.63,2420.7 63.77,2420.7 *.C3 97.98,2422.43 *.15 ; *.C4 97.98,2375.19 *.16 ; *.C1 97.98,2516.92 *.13 *.14 *.15 ; *.17 *.18 *.19 *.20 *.21 *.22 *.23 *.24 515.3,1786.21 ; *.12 *.11 *.10 *.9 *.8 ; *.37 *.36 *.33 ; C47.1 C45.1 395.32,903.46 400,898.79 v1(400,895) ; *.26@414.32,2041.21 411.05,2044.48 *.26 *.32 ; K.22 535.16,1125.16 K.25 ; 515.3,1781.21 515.3,1786.21 ; *.5 *.6 *.7 *.8 ; R74.1 C57.2 ; C58.2 C57.2 ; *.A3 634.4,1806.29 624.64,1796.53 606.36,1796.53 604.64,1796.53 589.32,1781.21 520.3,1781.21 515.3,1786.21 ; *.A10 601.92,2138.97 601.56,2138.97 554.32,2186.21 *.28 ; v1@700,515 633.21,515 C57.2 ; B1.2 795,2534.09 821.5,2507.6 822.4,2507.6 915,2415 v1(915,2380) 966.07,2328.93 B2.2@1024.81,2328.93 ; B1.2@800,2550.71 775.71,2575 632.44,2575 *.4 *.3 *.2 *.1 457.82,2375.19 *.29 ; B2.2@1024.74,2348.22 B2.2@1034.04,2338.93 ; *.16 *.15 ; *.16 242.08,2375.19 *.38 322.39,2361.02 *.39 *.30 ; *.32 *.33 ; *.32 *.35 *.34 *.31 *.25 515.3,1868.89 515.3,1786.21 ; *.33 *.27 *.28 ; *.8 375.54,2485.43 375.54,2400.78 *.30 ; *.30 377.51,2361.02 *.29 ; *.28 *.29
  Bottom Layer w10: C41.1 76.51,618.49 v1(45,650) 83,688 C40.1 ; v1(315,1390) 315,1328 R56.2 ; v1(400,895) 432.5,895 C43.1@487.5,950 ; C44.1 C43.1@487.5,950 ; C43.1 C43.1@487.5,950 ; v1(760,1215) 760,1279.72 C33.1 ; C33.1@760,1283.72 C42.1@760,1363 ; R2.1@855,1840 v1(855,1913) R1.1@855,1986 ; C4.2 1032.52,1845 v1(1115,1845) 1115,1897.69 C5.2 ; R.2 1085,2234.33 1122.48,2271.81 C3.2 1130,2292.52 v1(1130,2355)
  other v1: 705,515 520,1110 570,1110 520,1155 570,1155
  other v3: 688.43,1080.67
INTRP: K.18 R13.1 | length 516.6
  Top Layer w10: R13.1 143,930 158,945 197.14,945 v1(202.14,950) ; v1(435,1225) 489.25,1225 495.79,1218.46 K.18
  Bottom Layer w10: v1(202.14,950) 202.14,992.14 v1(435,1225)
INV_TO_RJ45: CN.10 R9.1 | length 772.3
  Top Layer w10: R9.1@171,630 R9.1@176,635 ; R9.1@171,635 247.22,635 247.45,635.24 334.76,635.24 470,500 470,400 550,320 740.16,320 CN.10
JUMPERS: D8.C R8.1 R80.1 | length 549.9
  Bottom Layer w10: D8.C 114,1315 136.11,1315 378.36,1557.25 409.25,1557.25 R8.1 ; R8.1@415,1558 540,1558 R80.1
KSZ_RST_OUT: D8.A D9.A K.24 R55.1 | length 698.6
  Top Layer w10: v1(150,1140) 150,1017 R55.1 225,1010 300.79,1085.79 K.24
  Bottom Layer w10: v1(150,1140) 152,1140 227,1215 D9.A D8.A
MAIN_RESET_1v8: *.A1 R80.2 S1.3 | length 245.1
  Top Layer w8: v1(606.89,1625) 607.85,1624.04 607.85,1544.75 S1.3
  Top Layer w10: v1(606.89,1625) 607.85,1625 630,1647.15 630,1699.4 *.A1@630,1709.37 ; *.A1 *.A1@637.35,1713.77 ; *.A1@634.7,1708.59 *.A1@637.14,1711.03
  Bottom Layer w10: R80.2@545,1622 548,1625 v1(606.89,1625)
MAIN_RESET_3v3: H.4 S1.6 | length 398.4
  Top Layer w8: S1.6 608.09,1456.91 v1(610,1455)
  Bottom Layer w8: v1(610,1455) 612.5,1457.5 952.5,1457.5 H.4
NetR9_2: R9.2 U.4 | length 62.2
  Top Layer w10: R9.2@102.82,632.82 U.4
PHY_LED0: K.23 R59.2 U.1 | length 550.9
  Top Layer w10: R59.2 143,847.5 172.85,877.35 202.35,877.35 v1(206.17,881.17) ; R59.2@153,840 154,839 U.1 ; v1(370,1107.79) 372,1105.79 469.88,1105.79 K.23
  Bottom Layer w10: v1(206.17,881.17) 206.17,916.17 370,1080 v1(370,1107.79)
PHY_RX_N: CN.6 K.3 | length 419.4
  Top Layer w8: CN.6 556.52,844.43 637.04,844.43 641.73,849.12 641.73,855.75 614.73,882.75 571.36,882.75 536,918.1 536,1059.35 K.3
PHY_RX_P: CN.3 K.4 | length 432.4
  Top Layer w8: K.4 554,1059.35 554,925.56 578.81,900.75 622.19,900.75 659.73,863.2 659.73,841.66 652.13,834.06 652.13,827.43 670,809.56 CN.3
PHY_TX_N: CN.2 K.5 | length 434.2
  Top Layer w8: K.5 575.37,1059.35 575.37,991.95 665.57,901.75 682.05,901.75 759.52,824.28 759.52,791.54 738.2,770.23 731.58,770.23 726.89,774.91 726.89,801.02 CN.2
PHY_TX_P: CN.1 K.6 | length 471.3
  Top Layer w8: K.6 593.37,1059.35 593.37,999.4 673.02,919.75 689.51,919.75 777.52,831.74 777.52,784.09 745.66,752.23 741.69,752.23 737,747.54 737,740.91 CN.1
RedLED: *.A7 D2.1 | length 229.1
  Top Layer w10: *.A7@637.21,1995 647.21,1985 v1(684.32,1985) ; v1(686.1,1915) 687.14,1913.96 687.14,1897.86 725.47,1859.53 726.57,1859.53 D2.1@751.1,1835
  Bottom Layer w10: v1(684.32,1985) 684.66,1984.66 684.66,1915.34 v1@685,1915
REXT: K.9 R60.2 | length 317.7
  Top Layer w10: K.9 904.34,1125.16 922.5,1107 R60.2
RJ_45_GND: C57.1 C58.1 CN.8 R74.2 | length 474
  Top Layer w10: CN.8@417.54,805.45 417.54,672.46 485,605 551.79,605 C58.1 C57.1 R74.2
RMII_MDC: *.C14 R46.2 | length 1810.1
  Top Layer w10: v1(50,1600) 15,1635 15,1851.89 53.14,1890.03 55.74,1890.03 62.87,1897.17 62.87,1899.38 65.5,1902.01 *.C14
  Bottom Layer w10: v1(50,1600) 145,1695 940,1695 990,1645 990,1193 R46.2@977,1180
RMII_MDIO: *.C15 R47.2 | length 1309.7
  Top Layer w10: v1(55,1640) 35,1660 35,1823.08 54.7,1842.79 55.74,1842.79 61.84,1848.89 *.C15@61.84,1851.84 ; *.C15@63.31,1850.36 65.5,1852.55 *.C15
  Bottom Layer w10: v1(55,1640) 125,1710 975,1710 1030,1655 R47.2@1030,1610
RST_D7: *.D7 R8.2 | length 121.9
  Top Layer w10: *.D7@468.06,1680.31 473.2,1680.31 *.D7@473.97,1680.31 ; *.D7@468.06,1680.56 468.06,1680.93 *.D7 ; *.D7@471.79,1680.31 *.D7@473.97,1680.31 ; v1@480,1640 479.28,1640.72 479.28,1674.99 *.D7@473.97,1680.31
  Bottom Layer w10: R8.2@415,1627 423,1635 v1(480,1635)
RXD0: K.13 R52.1 | length 349.1
  Top Layer w10: R52.1 407.5,1473.24 422.5,1458.24 541.87,1338.87 542.25,1338.87 595,1286.11 595,1220.63 594.53,1220.16 594.53,1210.12 K.13
RXD1: K.12 R53.1 | length 345.6
  Top Layer w10: R53.1 483.28,1428.65 558.06,1353.87 619.8,1292.12 K.12
RXER: K.17 R56.1 | length 192.4
  Top Layer w10: v1(475,1250) 495,1250 511.1,1233.9 511.1,1222.83 515.47,1218.46 K.17
  Bottom Layer w10: R56.1 407,1310 407,1293.5 450.5,1250 v1(475,1250)
S1_EN_RES: C6.1 R6.1 S1.7 S1.8 | length 283.9
  Top Layer w8: S1.8 S1.8@635.67,1505.26 ; C6.1@698,1373.54 701.54,1370 699.57,1370 683.88,1385.69 683.88,1410.82 621.89,1472.81 S1.7 635.42,1505.51 S1.8@635.67,1505.26 ; R6.1 698,1457.5 659.96,1495.54 635.93,1495.54 635.67,1495.8 S1.8@635.67,1505.26
S2_EN_RES: C7.1 R5.1 S2.7 S2.8 | length 225.5
  Top Layer w8: R5.1@843,1705 R5.1 843,1682.5 816.01,1655.51 S2.8 S2.7 766.89,1628.11 790,1605 843.46,1605 C7.1@845,1603.46
SWITCH0: *.A6 B2.1 R3.1 | length 710.7
  Top Layer w10: *.A6 *.A6@637.35,1949.99 ; *.A6@637.14,1947.25 *.A6@637.31,1947.25 ; *.A6@637.35,1947.25 767.75,1947.25 v1(770,1945) 1025.71,1945 B2.1
  Bottom Layer w10: v1(770,1945) R3.1
SWITCH1: *.A8 B1.1 R4.1 | length 452
  Top Layer w10: *.A8@634.4,2041.53 *.A8 637.14,2047.22 639.92,2050 v1(684.32,2050) ; v1(685,2150) 768.5,2150 795,2176.5 B1.1@795,2194.29 ; B1.1@815.71,2215 815.71,2175.79 821.5,2170 v1(865,2170)
  Bottom Layer w10: v1@685,2060 v1(685,2150) ; R4.1 865,2233 v1(865,2170)
TXD0: K.20 R49.2 | length 546.5
  Top Layer w10: R49.2 60.51,1473.63 75.51,1458.63 75.51,1444.49 v1(120,1400) ; v1(190,1400) 425.47,1164.53 K.20
  Bottom Layer w10: v1(120,1400) v1(190,1400)
TXD1: K.21 R51.2 | length 500.8
  Top Layer w10: R51.2 152.5,1473.63 167.5,1458.63 167.5,1391.39 414.04,1144.84 K.21
TXEN: K.19 R48.2 | length 416.4
  Top Layer w10: R48.2 237.5,1473.63 252.5,1458.63 252.5,1362.54 429.51,1185.53 430.3,1184.74 459.63,1184.74 459.84,1184.53 469.88,1184.53 K.19
UART_RXD_1v8: *.A13 S2.4 | length 655.1
  Top Layer w8: v1@697.94,1747.06 739.33,1705.67 S2.4@739.33,1689.49
  Top Layer w10: *.A13@637.35,2280.7 *.A13 637.14,2277.96 643.15,2271.95 658.05,2271.95 v1(710,2220)
  Bottom Layer w10: v1@695,1749.48 695,1857.47 710,1872.47 v1(710,2220)
  other v1: 695,1751.94
UART_RXD_3v3: H.2 S2.5 | length 403
  Top Layer w8: S2.5 739.59,1655.25 739.59,1642.82 740,1642.42 740,1556.89 902.91,1393.98 H.2
UART_TXD_1v8: *.A11 S2.3 | length 604.8
  Top Layer w8: v1(745.65,1751.94) 745.65,1747.61 753.11,1740.14 S2.3 753.37,1694.75 S2.3@753.37,1707.18
  Top Layer w10: *.A11@637.14,2183.47 640.61,2180 v1(735,2180)
  Bottom Layer w10: v1(735,2180) 735,2177.14 745,2167.14 v1@745,1751.94
UART_TXD_3v3: H.3 S2.6 | length 362
  Top Layer w8: S2.6 753.11,1562.16 908.29,1406.98 948.96,1406.98 H.3
VDD_1v2: C45.2 C47.2 K.1 | length 199.2
  Top Layer w10: C47.2 C45.2 402.82,1027 436.02,1060.2 K.1
VDDA_3.3: C43.2 C44.2 FL.2 K.2 | length 198
  Top Layer w10: v1(495,1024) 495,1027.04 515.16,1047.2 515.16,1059.88 K.2 ; FL.2 v1(1035,740)
  Bottom Layer w10: C44.2 v1(495,1024)
X0: C1.1 K.7 Y.3 | length 162.4
  Top Layer w10: K.7 628.46,1085.79 665.16,1049.09 678.66,1049.09 Y.3 688.43,965.43 C1.1
X1: C2.1 K.8 Y.1 | length 231
  Top Layer w10: K.8 714.8,1105.47 739.61,1080.67 Y.1 838.67,1080.67 C2.1
pads on no net: *.A2 *.A5 *.A12 *.A14 *.A15 *.A16 *.A17 *.A18 *.B1 *.B2 *.B3 *.B4 *.B5 *.B6 *.B7 *.B8 *.C2 *.C5 *.C6 *.C8 *.C9 *.C10 *.C11 *.C12 *.C13 *.C16 *.C17 *.C18 *.TP1 *.TP2 *.TP3 *.TP4 *.TP5 *.TP6 *.TP7 *.TP8 *.TP9 *.TP10 *.TP11 *.TP12 CN.7 CN.11 CN.12 CN.None CN.S1 CN.S2 H.6 S1.4 S1.5
copper on no net:
  other v2: 130,40 1050,40 190.42,63.39 1110.42,63.39 65.77,66.87 985.77,66.87 40,130 220,130 960,130 1140,130 63.7,190.67 983.7,190.67 195.69,191.32 1115.69,191.32 130,220 1050,220 1055,2405 1115.42,2428.39 990.77,2431.87 965,2495 1145,2495 988.7,2555.67 1120.69,2556.32 1055,2585

## Polygon pours and split planes (outlines as drawn)
GND on GND (split plane): 1159.9,20.1 20.1,20.1 20.1,2601.12 1159.9,2601.12
1v8 on 3v3 (split plane): 844.91,2280 845.26,2277.39 846.27,2274.96 847.87,2272.87 1009.91,2110.82 1009.91,1685.09 715,1685.09 712.39,1684.74 709.96,1683.74 707.87,1682.13 706.27,1680.04 705.26,1677.61 704.91,1675 704.91,1115.09 20.1,1115.09 20.1,2601.12 844.91,2601.12
3v3 on 3v3 (split plane): 1159.9,20.1 20.1,20.1 20.1,1094.91 244.91,1094.91 244.91,910 244.91,645 245.26,642.39 246.26,639.96 247.87,637.87 249.96,636.26 252.39,635.26 255,634.91 1095,634.91 1097.61,635.26 1100.04,636.26 1102.13,637.87 1103.73,639.96 1104.74,642.39 1105.09,645 1105.09,915 1104.74,917.61 1103.73,920.04 1102.13,922.13 1100.04,923.74 1097.61,924.74 1095,925.09 725.09,925.09 725.09,1055 725.09,1105 725.09,1664.91 1020,1664.91 1022.61,1665.26 1025.04,1666.26 1027.13,1667.87 1028.73,1669.96 1029.74,1672.39 1030.09,1675 1030.09,2115 1029.74,2117.61 1028.73,2120.04 1027.13,2122.13 865.09,2284.18 865.09,2601.12 1159.9,2601.12
VDDA_3.3 on 3v3 (split plane): 704.91,1055 704.91,915 705.26,912.39 706.27,909.96 707.87,907.87 709.96,906.26 712.39,905.26 715,904.91 1084.91,904.91 1084.91,655.09 265.09,655.09 265.09,910 265.09,1089.91 470,1089.91 472.61,1090.26 475.04,1091.26 477.13,1092.87 478.7,1094.91 704.91,1094.91

## Other copper
Top Layer:
  rectangle net GND: 170,1766.21 545,2466.21
3v3 (plane layer: these items are gaps in the copper):
  lines w20: -5,1105 715,1105 ; 470,1100 255,1100 255,910 255,645 1095,645 1095,915 798.33,915 732.5,915 715,915 715,1055 715,1105 ; 855,2620 855,2280 1020,2115 1020,1675 715,1675 715,1105 ; 1175,1315 1175,1365 ; 1180,350 1180,375

## Silkscreen, mask and mechanical layers (free items; w line width, h text height)
Mechanical 1:
  lines w10: 0,0 1175,0 1175,2621.21 0,2621.21 0,0

## Text inside footprints (layer, text, board x,y; h text height)
CN: Mechanical 4 "12" at 289.77,402.71 h73.82 r180; Mechanical 4 "11" at 424.63,347.5 h73.82 r180; Mechanical 4 "10" at 705.39,412.56 h73.82 r180; Mechanical 4 "9" at 840.47,347.52 h73.82 r180; Mechanical 4 "FRONT" at 532.32,204.52 h73.82 r180; Mechanical 4 "RIGHT" at 306.54,78.96 h73.82 r180; Mechanical 4 "LEFT" at 795.88,78.55 h73.82 r180; Mechanical 4 "2" at 745.52,793.89 h73.82 r180; Mechanical 4 "4" at 645.12,793.52 h73.82 r180; Mechanical 4 "6" at 544.71,794.63 h73.82 r180; Mechanical 4 "8" at 444.34,794.2 h73.82 r180; Mechanical 4 "7" at 494.66,693.52 h73.82 r180; Mechanical 4 "5" at 595,693.94 h73.82 r180; Mechanical 4 "3" at 695.28,693.39 h73.82 r180; Mechanical 4 "1" at 795.97,693.85 h73.82 r180; Mechanical 4 "12" at 289.77,402.71 h73.82 r180; Mechanical 4 "11" at 424.63,347.5 h73.82 r180; Mechanical 4 "10" at 705.39,412.56 h73.82 r180; Mechanical 4 "9" at 840.47,347.52 h73.82 r180; Mechanical 4 "FRONT" at 532.32,204.52 h73.82 r180; Mechanical 4 "RIGHT" at 306.54,78.96 h73.82 r180; Mechanical 4 "LEFT" at 795.88,78.55 h73.82 r180; Mechanical 4 "2" at 745.52,793.89 h73.82 r180; Mechanical 4 "4" at 645.12,793.52 h73.82 r180; Mechanical 4 "6" at 544.71,794.63 h73.82 r180; Mechanical 4 "8" at 444.34,794.2 h73.82 r180; Mechanical 4 "7" at 494.66,693.52 h73.82 r180; Mechanical 4 "5" at 595,693.94 h73.82 r180; Mechanical 4 "3" at 695.28,693.39 h73.82 r180; Mechanical 4 "1" at 795.97,693.85 h73.82 r180; Bottom Overlay "+" at 315,277.91 h73.82 r180; Bottom Overlay "-" at 439.62,237.19 h73.82 r180; Bottom Overlay "-" at 795,352.91 h73.82 r180; Bottom Overlay "+" at 825,217.91 h73.82 r180